# EAGLE board UpTo11.FrontPanel (EAGLE 7.6.0)

Size 48 x 38 mm. Coordinates in mm from the lower left corner, seen from the top.
Outline: 0,0 48,0 48,38 0,38 0,0
Copper layers (1*16): Top 0.035mm / dielectric 1.5mm / Bottom 0.035mm
Design rules "default": minimum track width 10mil, minimum drill 24mil, track to track 8mil, track to pad 8mil, pad to pad 8mil, via to via 8mil, smd to smd 8mil, copper to edge 40mil, drill to drill 8mil, minimum pad ring 10mil, minimum via ring 8mil, stop-mask expansion 4mil, vias tented up to drill 0mil, thermal gap 10mil
Net classes: 0 default: clearance 0.205 mm
Holes 7 mm at 18.5,20
Milling: area 9.5,18.5 to 10.7,21.1

## Footprints (pad centres in the part's own frame; a part is rotated, then mirrored left to right if it is on the bottom)
LED5MM = drill 0.813 pad 1.676 octagon: A -1.27,0; K 1.27,0
1X06 = drill 1.016 octagon: 1 -6.35,0; 2 -3.81,0; 3 -1.27,0; 4 1.27,0; 5 3.81,0; 6 6.35,0
1206 = smd 1.6 x 1.803: A -1.422,0; C 1.422,0

## Placement (x,y rotation side)
FLASH_LED  [LED5MM]  39,27 0 top
FRONT_PANEL_INTERFACE  [1X06]  24,2 0 top
POWER  [1206]  40,6 0 top

## Library data of the parts
FLASH_LED FRONT_PANEL_INTERFACE POWER = adafruit

## Nets
GND_EX: FLASH_LED.K FRONT_PANEL_INTERFACE.1 POWER.C
LED_FLASH: FLASH_LED.A FRONT_PANEL_INTERFACE.4
LED_PWR: FRONT_PANEL_INTERFACE.3 POWER.A
POT_IN: FRONT_PANEL_INTERFACE.5
POT_OUT: FRONT_PANEL_INTERFACE.6
VCC: FRONT_PANEL_INTERFACE.2

## Tracks (layer width: path | path; a pad name or v marks a point on that pad's centre or on a via)
GND_EX  (2 unrouted)
LED_FLASH  (1 unrouted)
LED_PWR  (1 unrouted)

## Text on the board
tNames: Up To 11 - Front Panel | LED_FLASH | LED_PWR | POT_OUT | GND | VCC | POT_IN
bNames: Up To 11 - MotherBoard | https://bit.ly/38Kq3UG | PCBv1 - 2019.12 | MadeInTheUSB.net | www.FredericTorres.com